# EAGLE board ctrlr (EAGLE 8.7.1)
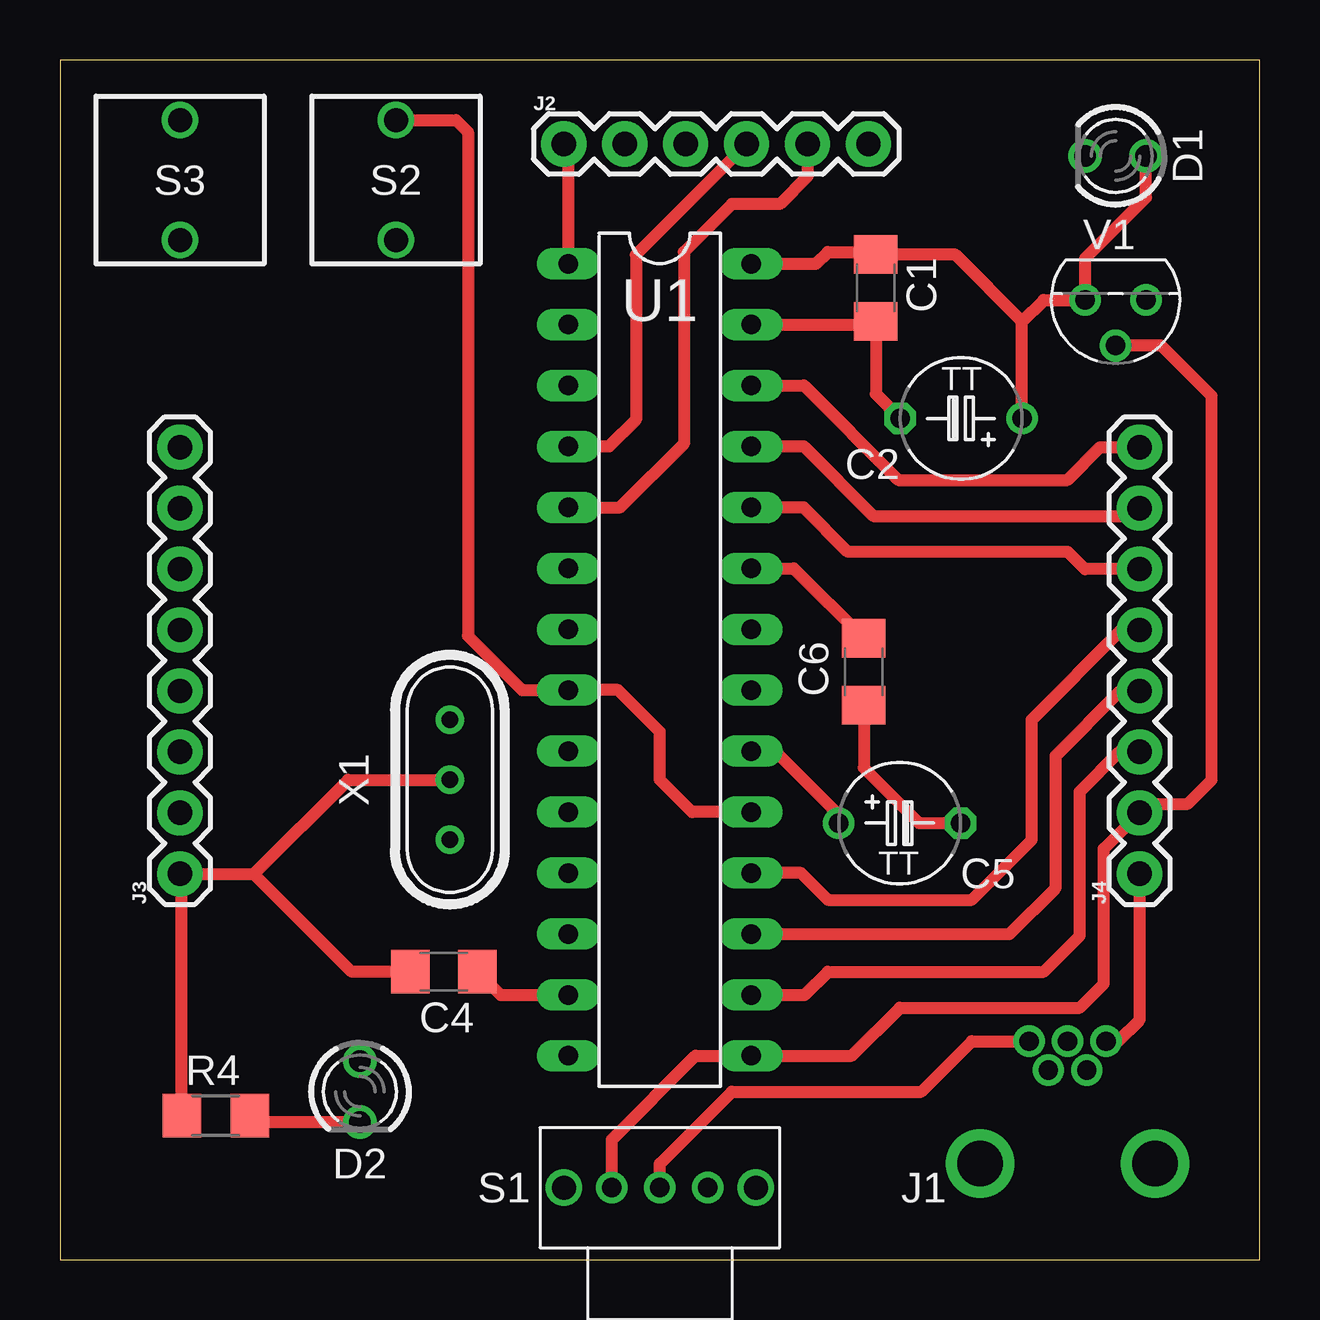
[diagram p0: board, top side]
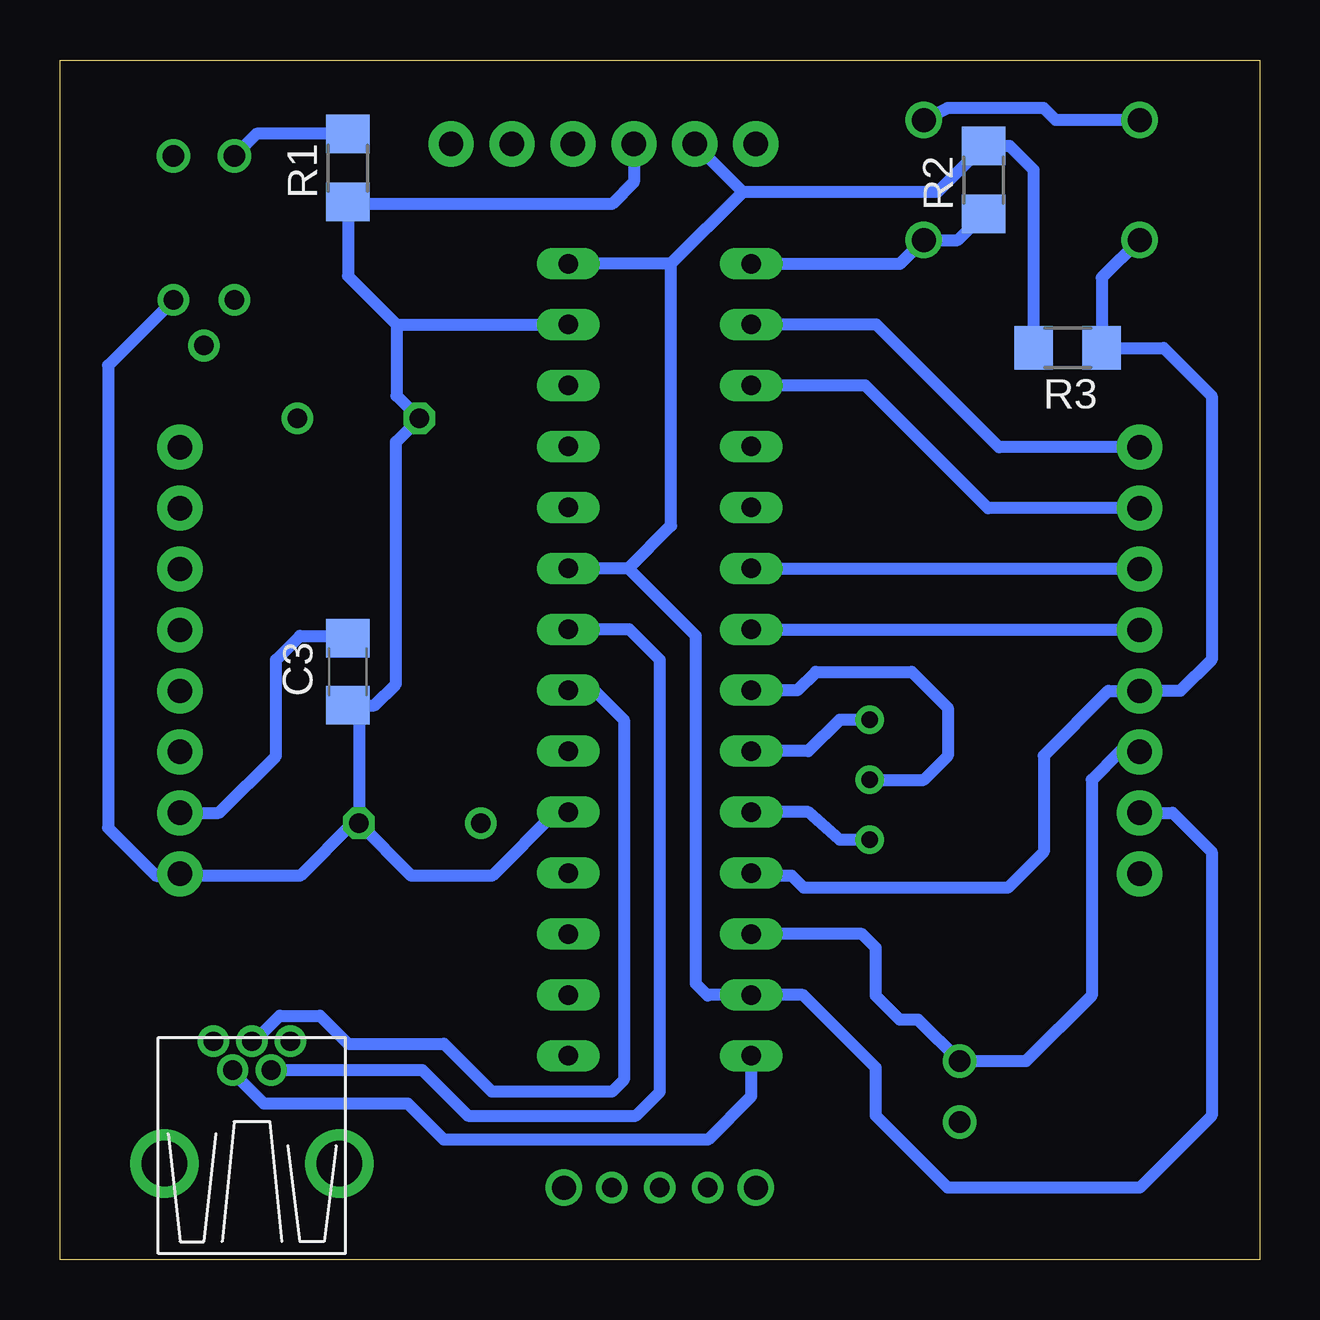
[diagram p1: board, bottom side, seen from below]

Size 50 x 50 mm. Coordinates in mm from the lower left corner, seen from the top.
Outline: 0,0 50,0 50,50 0,50 0,0
Copper layers (1*16): Top 0.035mm / dielectric 1.5mm / Bottom 0.035mm
Design rules "me433": minimum track width 6mil, minimum drill 0.35mm, track to track 6mil, track to pad 6mil, pad to pad 6mil, via to via 6mil, smd to smd 6mil, copper to edge 40mil, drill to drill 6mil, minimum pad ring 10mil, minimum via ring 8mil, stop-mask expansion 4mil, vias tented up to drill 0mil, thermal gap 10mil

## Footprints (pad centres in the part's own frame; a part is rotated, then mirrored left to right if it is on the bottom)
C1206 = smd 1.6 x 1.8: 1 -1.4,0; 2 1.4,0
TAP5-50 = drill 0.813: + -2.54,0 | drill 0.813 octagon: - 2.54,0
LED-3MM-V = drill 0.9: A -1.27,0; K 1.27,0
USB-MB-TO = drill 0.8: D+ 5.1,0; D- 3.9,0.8; GND 5.1,-1.6; ID 3.9,-0.8; VBUS 5.1,1.6 | drill 1.9: P$6 0,-3.65; P$7 0,3.65
CONN_1X06 = drill 1.016 pad 1.88: 1 0,0; 2 2.54,0; 3 5.08,0; 4 7.62,0; 5 10.16,0; 6 12.7,0
CONN_1X08 = drill 1.016 pad 1.88: 1 0,0; 2 2.54,0; 3 5.08,0; 4 7.62,0; 5 10.16,0; 6 12.7,0; 7 15.24,0; 8 17.78,0
R1206 = smd 1.6 x 1.803: 1 -1.422,0; 2 1.422,0
PCPIN-3SS = drill 0.8: 1 -2,0; 2 0,0; 3 2,0 | drill 1: A1 -4,0; A2 4,0
PCPIN-2 = drill 1: 1 0,0; 2 5,0
DIP28-3 = drill 0.813 long: 1 -16.51,-3.81; 2 -13.97,-3.81; 3 -11.43,-3.81; 4 -8.89,-3.81; 5 -6.35,-3.81; 6 -3.81,-3.81; 7 -1.27,-3.81; 8 1.27,-3.81; 9 3.81,-3.81; 10 6.35,-3.81; 11 8.89,-3.81; 12 11.43,-3.81; 13 13.97,-3.81; 14 16.51,-3.81; 15 16.51,3.81; 16 13.97,3.81; 17 11.43,3.81; 18 8.89,3.81; 19 6.35,3.81; 20 3.81,3.81; 21 1.27,3.81; 22 -1.27,3.81; 23 -3.81,3.81; 24 -6.35,3.81; 25 -8.89,3.81; 26 -11.43,3.81; 27 -13.97,3.81; 28 -16.51,3.81
TO-92 = drill 0.813: 1 -1.27,0; 2 0,1.905; 3 1.27,0
RAD-3-2.5 = drill 0.7 pad 1.2: 1 -2.5,0; 2 0,0; 3 2.5,0

## Placement (x,y rotation side)
C1  0.1uF  [C1206]  34,40.5 270 top
C2  10uF  [TAP5-50]  37.56,35.06 180 top
C3  0.1uF  [C1206]  38,24.5 270 bottom
C4  0.1uF  [C1206]  16,12 180 top
C5  10uF  [TAP5-50]  35,18.19 0 top
C6  0.1uF  [C1206]  33.5,24.5 270 top
D1  LED-RED  [LED-3MM-V]  44,46 180 top
D2  LED-GREEN  [LED-3MM-V]  12.5,7 270 top
J1  USB-MINI-B  [USB-MB-TO]  42,4 90 top
J2  HEADER-6  [CONN_1X06]  21,46.5 0 top
J3  HEADER-8  [CONN_1X08]  5,16.08 90 top
J4  HEADER-8  [CONN_1X08]  45,16.08 90 top
R1  330  [R1206]  38,45.5 90 bottom
R2  10.0k  [R1206]  11.5,45 90 bottom
R3  10.0k  [R1206]  8,38 180 bottom
R4  330  [R1206]  6.5,6 0 top
S1  1825232-1  [PCPIN-3SS]  25,3 0 top
S2  EVQ-11A07K  [PCPIN-2]  14,42.5 90 top
S3  EVQ-11A07K  [PCPIN-2]  5,42.5 90 top
U1  PIC32MX250F128B  [DIP28-3]  25,25 270 top
V1  MCP1702  [TO-92]  44,40 180 top
X1  CSTLS8M00G53  [RAD-3-2.5]  16.25,20 270 top

## Library data of the parts
C1-C6 = rcl; SPICEPREFIX: C
D1 = me433; COLOR: RED
D2 = me433; COLOR: GREEN
J1-J4 S1-S3 U1 V1 X1 = me433
R1-R4 = rcl; SPICEPREFIX: R

## Nets
+3V3: C1.1 C2.+ C4.1 C6.1 D1.A J2.2 J3.2 R2.2 R3.2 U1.13 U1.23 U1.28 V1.3
+5V: C3.1 J4.2 S1.1 U1.15 V1.2
A0: J3.8 U1.2
A1: J3.7 U1.3
A4: D2.A J3.3 U1.12
B2: J3.6 U1.6
B3: J3.5 U1.7
B4: J3.4 R3.1 S3.1 U1.11
B7: J4.3 U1.16
B8: J4.4 U1.17
B9: J4.5 U1.18
B13: J4.6 U1.24
B14: J4.7 U1.25
B15: J4.8 U1.26
D+: J1.D+ U1.21
D-: J1.D- U1.22
GND: C1.2 C2.- C3.2 C4.2 C5.- C6.2 J1.GND J2.3 J3.1 J4.1 R1.1 R4.1 S2.2 S3.2 U1.8 U1.19 U1.27 V1.1 X1.2
MCLR: J2.1 R2.1 S2.1 U1.1
N$1: D2.K R4.2
N$4: D1.K R1.2
N$5: J1.VBUS S1.2
N$6: C5.+ U1.20
OSC1: U1.9 X1.1
OSC2: U1.10 X1.3
PGC: J2.5 U1.5
PGD: J2.4 U1.4
USBID: J1.ID U1.14

## Tracks (layer width: path | path; a pad name or v marks a point on that pad's centre or on a via)
+3V3
  Top 0.508: C4.1 18.37,11.03 U1.13 | U1.23 30.59,28.81 C6.1 | C1.1 33.9,42 32,42 31.51,41.51 U1.28 | C2.+ 40.1,39.1 | 40.1,39.1 41,40 V1.3 42.73,41.73 45.27,44.27 D1.A | 33.61,41.51 C1.1 | C1.1 37.3,41.9 40.1,39.1
  Bottom 0.508: R3.2 9.42,45.42 10.42,46.42 R2.2 13.42,44.5 21.54,44.5 | 23.54,46.54 J2.2 21.54,44.5 | 24.53,41.51 U1.28 | 26.31,28.81 23.5,26 23.5,11.5 23,11 22.97,11.03 U1.13 19.03,11.03 16,8 16,6 13,3 5,3 2,6 2,17 3.62,18.62 J3.2 | 26.31,28.81 U1.23 | 21.54,44.5 24.53,41.51 | 26.31,28.81 24.53,30.59 24.53,41.51
+5V
  Top 0.508: S1.1 23,5 26.49,8.49 U1.15 32.99,8.49 35,10.5 42.5,10.5 43.5,11.5 43.5,17.12 J4.2 45.38,19 47,19 48,20 48,36 45.91,38.09 V1.2
  Bottom 0.508: C3.1 38.1,26 40,26 41,25 41,21 43.38,18.62 J4.2
A0
  Bottom 0.508: J3.8 10.86,33.86 15.97,38.97 U1.2
A1
  Bottom 0.508: U1.3 16.43,36.43 11.32,31.32 J3.7
A4
  Bottom 0.508: U1.12 16.57,13.57 16,13 16,11 15,10 14.23,10 D2.A 9.73,8.27 7,11 7,20 5.84,21.16 J3.3
B2
  Bottom 0.508: J3.6 21.16,28.78 U1.6
B3
  Bottom 0.508: J3.5 21.16,26.24 U1.7
B4
  Bottom 0.508: S3.1 6.58,40.92 R3.1 4,38 2,36 2,25 3.3,23.7 J3.4 6.3,23.7 9,21 9,17 10.5,15.5 19,15.5 19.5,16 21.08,16 U1.11
B7
  Top 0.508: J4.3 44.16,21.16 42.5,19.5 42.5,13.5 41,12 32,12 31.03,11.03 U1.16
B8
  Top 0.508: J4.4 44.2,23.7 41.5,21 41.5,15.5 39.57,13.57 U1.17
B9
  Top 0.508: J4.5 44.24,26.24 40.5,22.5 40.5,17.5 38,15 32,15 30.89,16.11 U1.18
B13
  Top 0.508: U1.24 31,31.35 32.85,29.5 42,29.5 42.72,28.78 J4.6
B14
  Top 0.508: U1.25 31,33.89 33.89,31 44.68,31 J4.7
B15
  Top 0.508: U1.26 31,36.43 34.93,32.5 42,32.5 43.36,33.86 J4.8
D+
  Bottom 0.508: J1.D+ 41.9,9.1 40.84,10.16 39.16,10.16 38,9 34,9 32,7 27,7 26.5,7.5 26.5,22.5 27.73,23.73 U1.21
D-
  Bottom 0.508: J1.D- 34.9,7.9 33,6 26,6 25,7 25,25 26.27,26.27 U1.22
GND
  Top 0.508: 8.08,16.08 J3.1 5.08,16 R4.1 | 8.08,16.08 12,20 X1.2 | S2.2 16.5,47.5 17,47 17,26 19.27,23.73 U1.8 23.27,23.73 25,22 25,20 26.35,18.65 U1.19 | C4.2 12.16,12 8.08,16.08 | C6.2 33.5,20.5 35.81,18.19 C5.- | U1.27 33.87,38.97 C1.2 34,36.08 C2.- | J1.GND 44.1,9.1 45,10 J4.1
  Bottom 0.508: S3.2 8.5,47.5 9,48 13,48 S2.2 | U1.19 29.35,18.65 32,16 35.35,16 C5.- | C5.- 37.81,18.19 40,16 44.92,16 | 44.92,16 J4.1 | C5.- 37.54,22.64 C3.2 36.9,23.1 36,24 36,34.08 C2.- 35.97,36.01 35.97,38.97 | J2.3 26.08,44.92 27,44 37.92,44 R1.1 38,41 35.97,38.97 | 35.97,38.97 U1.27 | X1.2 14,20 13,21 13,23 14.5,24.5 18.5,24.5 19.27,23.73 U1.8 | 44.92,16 46,16 48,18 48,37.27 V1.1
MCLR
  Top 0.508: U1.1 21.19,46.31 J2.1
  Bottom 0.508: U1.1 14.99,41.51 S2.1 12.58,42.5 R2.1
N$1
  Top 0.508: R4.2 8.19,5.73 D2.K
N$4
  Bottom 0.508: R1.2 41.81,46.92 D1.K
N$5
  Top 0.508: S1.2 25,4 28,7 35.9,7 38,9.1 J1.VBUS
N$6
  Top 0.508: U1.20 29,21 30,21 32.46,18.54 C5.+
OSC1
  Bottom 0.508: X1.1 17.5,22.5 18.81,21.19 U1.9
OSC2
  Bottom 0.508: X1.3 17.5,17.5 18.81,18.65 U1.10
PGC
  Top 0.508: U1.5 23.35,31.35 26,34 26,42 28,44 30,44 31.16,45.16 J2.5
PGD
  Top 0.508: J2.4 24,41.88 24,35 22.89,33.89 U1.4
USBID
  Bottom 0.508: U1.14 21.19,6.81 23,5 34,5 35.5,6.5 41.5,6.5 42.8,7.8 J1.ID